# EAGLE board pcr-keep-alive r2 (EAGLE 7.7.0)
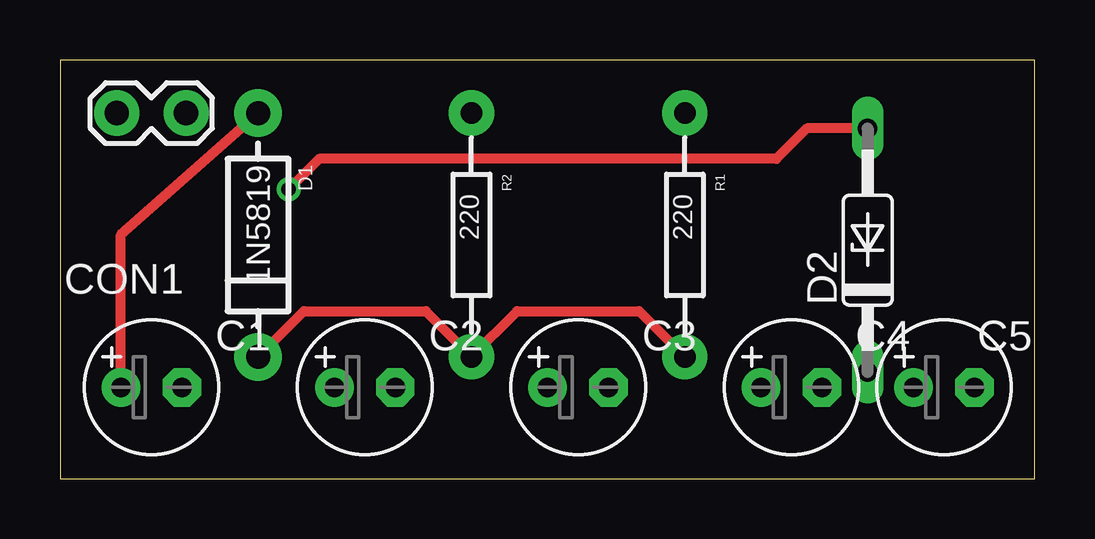
[diagram p0: board, top side]
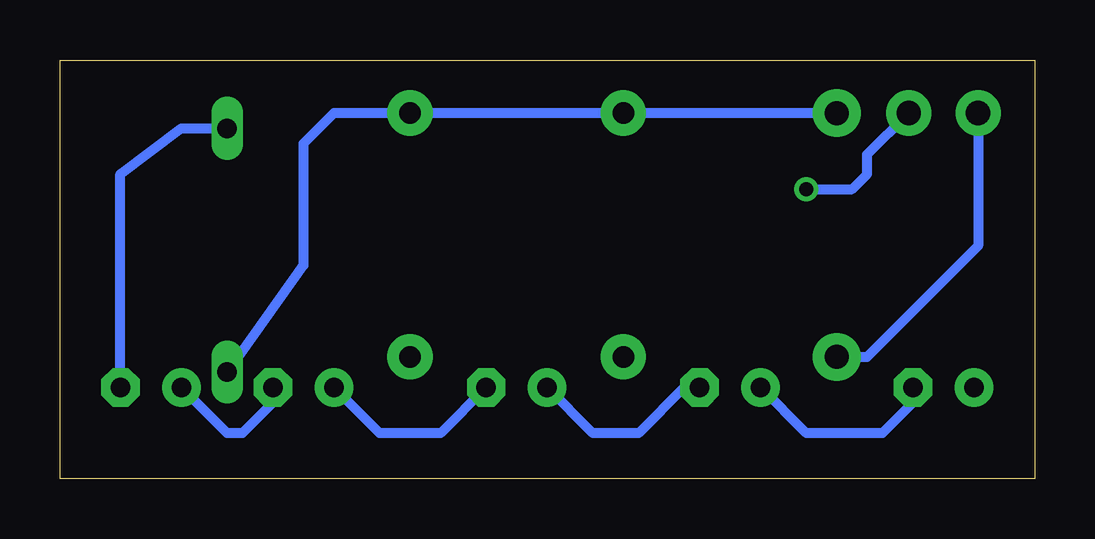
[diagram p1: board, bottom side, seen from below]

Size 40.62 x 17.45 mm. Coordinates in mm from the lower left corner, seen from the top.
Outline: 0,0 40.62,0 40.62,17.45 0,17.45 0,0
Copper layers (1*16): Top 0.035mm / dielectric 1.5mm / Bottom 0.035mm
Design rules "default": minimum track width 10mil, minimum drill 24mil, track to track 8mil, track to pad 8mil, pad to pad 8mil, via to via 8mil, smd to smd 8mil, copper to edge 40mil, drill to drill 8mil, minimum pad ring 10mil, minimum via ring 8mil, stop-mask expansion 4mil, vias tented up to drill 0mil, thermal gap 10mil
Net classes: 0 default: width 0.254 mm, clearance 0.254 mm; 1 Power: width 0.406 mm, clearance 0.254 mm; 2 Phone: width 0.305 mm, clearance 0.381 mm; 3 Nasty Loads: width 0.61 mm, clearance 0.61 mm

## Footprints (pad centres in the part's own frame; a part is rotated, then mirrored left to right if it is on the bottom)
E2,5-6 = drill 0.813 pad 1.6: + -1.27,0 | drill 0.813 pad 1.6 octagon: - 1.27,0
1X02_LOCK = drill 1.016 pad 1.88: 1 -0.178,0; 2 2.718,0
DIODE-1N4001 = drill 1 pad 1.981: A 5.08,0; C -5.08,0
DO35Z10 = drill 0.813 long: A 5.08,0; C -5.08,0
AXIAL-0.4-RES = drill 0.9 pad 1.88: P$1 -5.08,0; P$2 5.08,0

## Placement (x,y rotation side)
C1  1F @ 2.7V  [E2,5-6]  3.81,3.81 0 top
C2  1F @ 2.7V  [E2,5-6]  12.7,3.81 0 top
C3  1F @ 2.7V  [E2,5-6]  21.59,3.81 0 top
C4  1F @ 2.7V  [E2,5-6]  30.48,3.81 0 top
C5  1F @ 2.7V  [E2,5-6]  36.83,3.81 0 top
CON1  [1X02_LOCK]  5.08,15.24 180 top
D1  1N5819  [DIODE-1N4001]  8.26,10.16 90 top
D2  1N5243B  [DO35Z10]  33.66,9.53 90 top
R1  220  [AXIAL-0.4-RES]  26.04,10.16 270 top
R2  220  [AXIAL-0.4-RES]  17.14,10.16 270 top

## Library data of the parts
C1-C5 = rcl
CON1 D1 R1 R2 = SPCoast
D2 = diode

## Nets
N$1: C1.- C2.+
N$2: C2.- C3.+
N$3: C3.- C4.+
N$4: C4.- C5.+
N$6: C1.+ D1.A D2.C R1.P$1 R2.P$1
NEG: C5.- CON1.1 D2.A
POS: CON1.2 D1.C R1.P$2 R2.P$2

## Tracks (layer width: path | path; a pad name or v marks a point on that pad's centre or on a via)
N$1
  Bottom 0.406: C1.- 5.08,3.17 6.35,1.91 9.53,1.91 C2.+
N$2
  Bottom 0.406: C2.- 14.61,3.81 16.51,1.91 18.41,1.91 C3.+
N$3
  Bottom 0.406: C3.- 24.77,1.91 27.3,1.91 C4.+
N$4
  Bottom 0.406: C4.- 31.75,3.17 33.02,1.91 33.66,1.91 C5.+
N$6
  Top 0.406: C1.+ 2.54,10.16 D1.A
  Bottom 0.406: D1.A R2.P$1 R1.P$1 29.21,15.24 30.48,13.97 30.48,8.89 D2.C
NEG  (via drill 0.6)
  Top 0.406: D2.A 31.11,14.61 29.84,13.34 10.79,13.34 v9.53,12.06
  Bottom 0.406: C5.- 38.1,12.7 35.56,14.61 D2.A | v9.53,12.06 7.62,12.06 6.99,12.7 6.99,13.51 CON1.1
POS
  Top 0.406: D1.C 10.16,6.99 15.24,6.99 R2.P$2 19.05,6.99 24.13,6.99 R1.P$2
  Bottom 0.406: CON1.2 2.36,9.7 6.99,5.08 D1.C

## Text on the board
tDocu: - + | - +
bDocu: PCR Keep Alive / Version 1.0 / Seth Neumann / July 20. 2020